# Altium PCB PCB1.PcbDoc
Units mm, origin at the board's own origin, x right, y up, seen from the top; angles counter-clockwise.
Board outline 45 x 33 mm, 2 copper layers (Top Layer, Bottom Layer); 4 components, 16 nets, 32 pads, 0 vias.
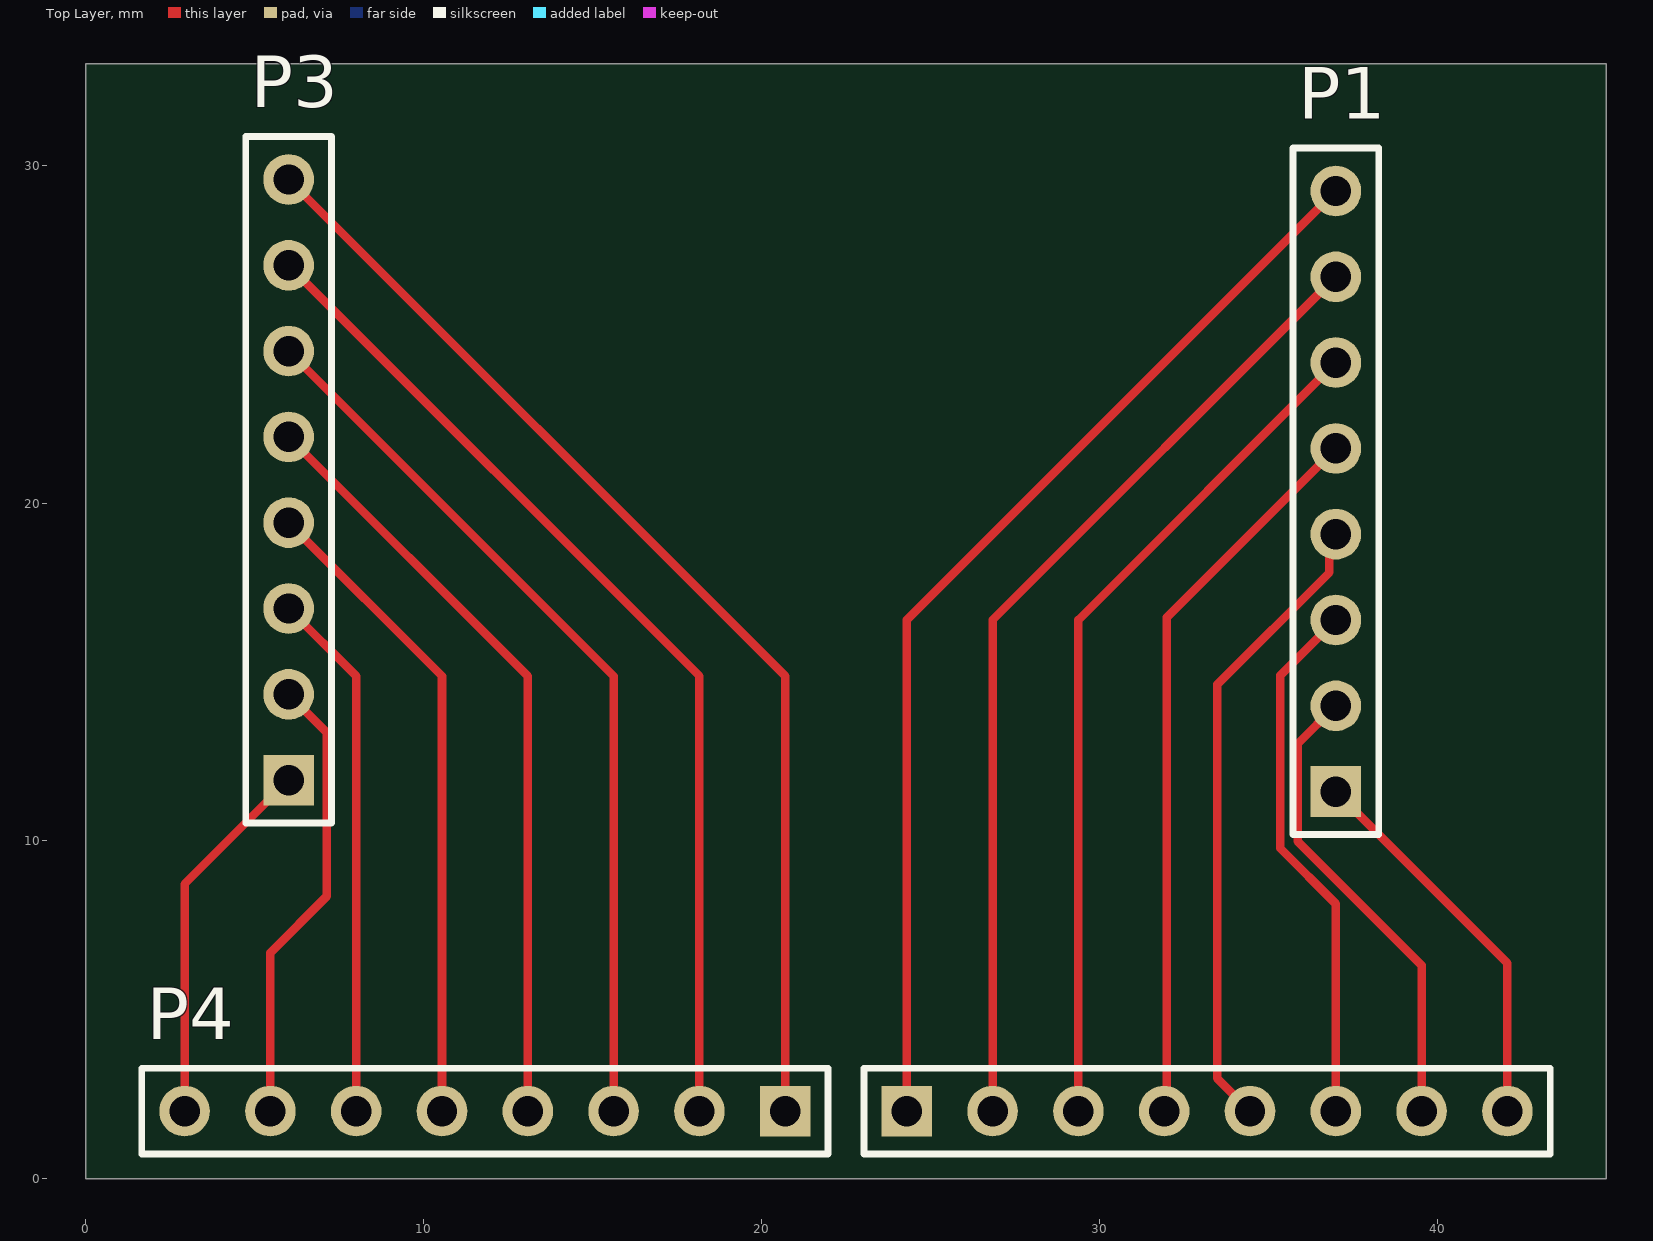
[diagram p0: Top Layer view]
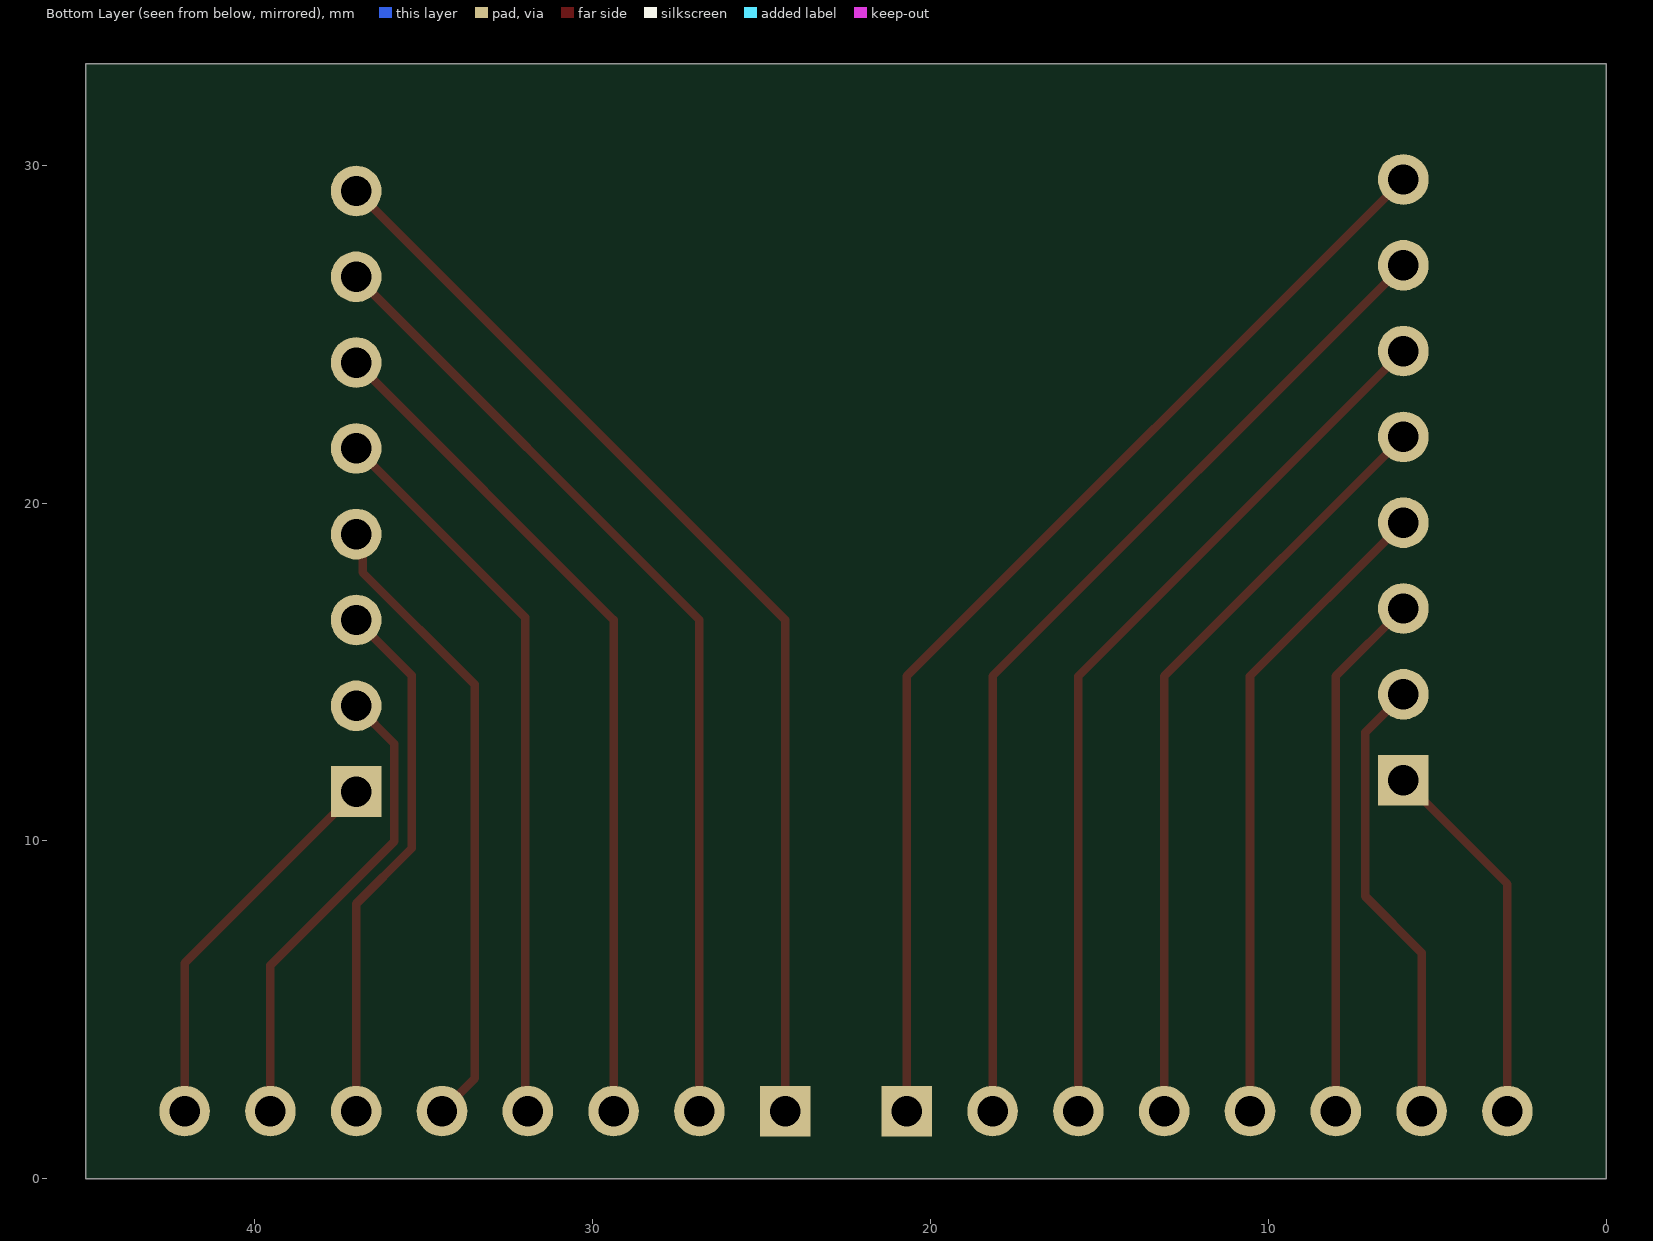
[diagram p1: Bottom Layer view, seen from below]

## Layer stack, top to bottom
Top Solder: solder mask 0.0102, Solder Resist, Dk 3.5
Top Layer: signal copper 0.0356
Dielectric 1: dielectric 0.32, FR-4, Dk 4.8
Bottom Layer: signal copper 0.0356
Bottom Solder: solder mask 0.0102, Solder Resist, Dk 3.5

## Board outline
0,0 45,0 45,33 0,33

## Design rules (kind name [scope] priority, off if disabled: settings)
Clearance [All] p1: gap=0.254 ignorepadtopadclearanceinfootprint=FALSE except(0: Arc-Hole Track-Hole SMDPad-Hole THPad-Hole Via-Hole Fill-Hole Poly-Hole Region-Hole Text-Hole)
PolygonConnect [All] p1: connectstyle=Relief reliefconductorwidth=0.254 reliefentries=4 polygonreliefangle="90 Angle" airgapwidth=0.254
RoutingVias [All] p1: holewidth=0.711 width=1.27 viastyle="Through Hole" minholewidth=0.711 minwidth=1.27 maxholewidth=0.711 maxwidth=1.27
SolderMaskExpansion [All] p1: expansion=0.102 istentingtop=FALSE
Width [All] p1: maxlimit=0.254 minlimit=0.254 preferedwidth=0.254
30 further rules are at their usual default settings.

## Components (designator, comment, footprint, x,y, rotation, side; value= is the part's Value field where it differs from the comment)
P1 "Header 8" HDR1X8 37,11.46 r90 top
P2 "Header 8" HDR1X8 24.3,2 r0 top
P3 "Header 8" HDR1X8 6,11.8 r90 top
P4 "Header 8" HDR1X8 20.7,2 r180 top

## Footprints (in the part's own frame and the unit in brackets; to place one, negate y for a bottom-side part, rotate by r counter-clockwise, add the part's x,y. Pads: shape width x height; smd on the part's side, far side on the other; paste and mask are expansions set on the pad)
HDR1X8 [mm] "Connector; Header; 8 Position"
  rect 1.5x1.5 hole 0.9: 1(0,0)
  round 1.5 hole 0.9: 2(2.54,0) 3(5.08,0) 4(7.62,0) 5(10.16,0) 6(12.7,0) 7(15.24,0) 8(17.78,0)
  silkscreen extent -1.27,-1.27 19.05,1.27

## Part data
P1 P2 P3 P4: "Header, 8-Pin", LatestRevisionDate=17-Jul-2002, LatestRevisionNote="Re-released for DXP Platform.", Publisher="Altium Limited"

## Nets (pads, with @x,y where several pads share a name; then routed paths per layer and width w, separated by ;. In a path a pad name is that pad's centre, name@x,y a point inside that pad or via, vN(x,y) a via of type N, cw(c..) or ccw(c..) an arc to the next point about the centre after c; other vN are vias at no path point)
NetP1_1: P1.1 P2.8 | length 11.6
  Top Layer w0.254: P1.1 42.08,6.38 P2.8
NetP1_2: P1.2 P2.7 | length 14
  Top Layer w0.254: P1.2 35.869,12.869 35.869,9.988 39.54,6.317 P2.7
NetP1_3: P1.3 P2.6 | length 15.9
  Top Layer w0.254: P2.6 37,8.139 35.361,9.778 35.361,14.901 P1.3
NetP1_4: P1.4 P2.5 | length 18.9
  Top Layer w0.254: P2.5 33.492,2.968 33.492,14.631 36.81,17.949 36.81,18.89 P1.4
NetP1_5: P1.5 P2.4 | length 21.7
  Top Layer w0.254: P2.4 32,2.08 32,16.62 P1.5
NetP1_6: P1.6 P2.3 | length 25.3
  Top Layer w0.254: P2.3 29.38,16.54 P1.6
NetP1_7: P1.7 P2.2 | length 28.9
  Top Layer w0.254: P2.2 26.84,16.54 P1.7
NetP1_8: P1.8 P2.1 | length 32.5
  Top Layer w0.254: P2.1 24.3,16.54 P1.8
NetP3_1: P3.1 P4.8 | length 11.1
  Top Layer w0.254: P4.8 2.92,8.72 P3.1
NetP3_2: P3.2 P4.7 | length 13.5
  Top Layer w0.254: P4.7 5.46,6.687 7.131,8.358 7.131,13.209 P3.2
NetP3_3: P3.3 P4.6 | length 15.7
  Top Layer w0.254: P3.3 8,14.88 P4.6
NetP3_4: P3.4 P4.5 | length 19.3
  Top Layer w0.254: P3.4 10.54,14.88 P4.5
NetP3_5: P3.5 P4.4 | length 22.9
  Top Layer w0.254: P3.5 13.08,14.88 P4.4
NetP3_6: P3.6 P4.3 | length 26.5
  Top Layer w0.254: P3.6 15.62,14.88 P4.3
NetP3_7: P3.7 P4.2 | length 30.1
  Top Layer w0.254: P3.7 18.16,14.88 P4.2
NetP3_8: P3.8 P4.1 | length 33.7
  Top Layer w0.254: P3.8 20.7,14.88 P4.1

## Silkscreen, mask and mechanical layers (free items; w line width, h text height)
Mechanical 1:
  the board outline again, w0.254